# Altium PCB base_tiempo.PcbDoc (part 1 of 3)
Units mil, origin at the board's own origin, x right, y up, seen from the top; angles counter-clockwise.
Board outline 9832.52 x 6640 mil, 2 copper layers (Top Layer, Bottom Layer); 185 components, 479 nets, 1064 pads, 206 vias.
Unrouted connection lines stored in the file: 3.
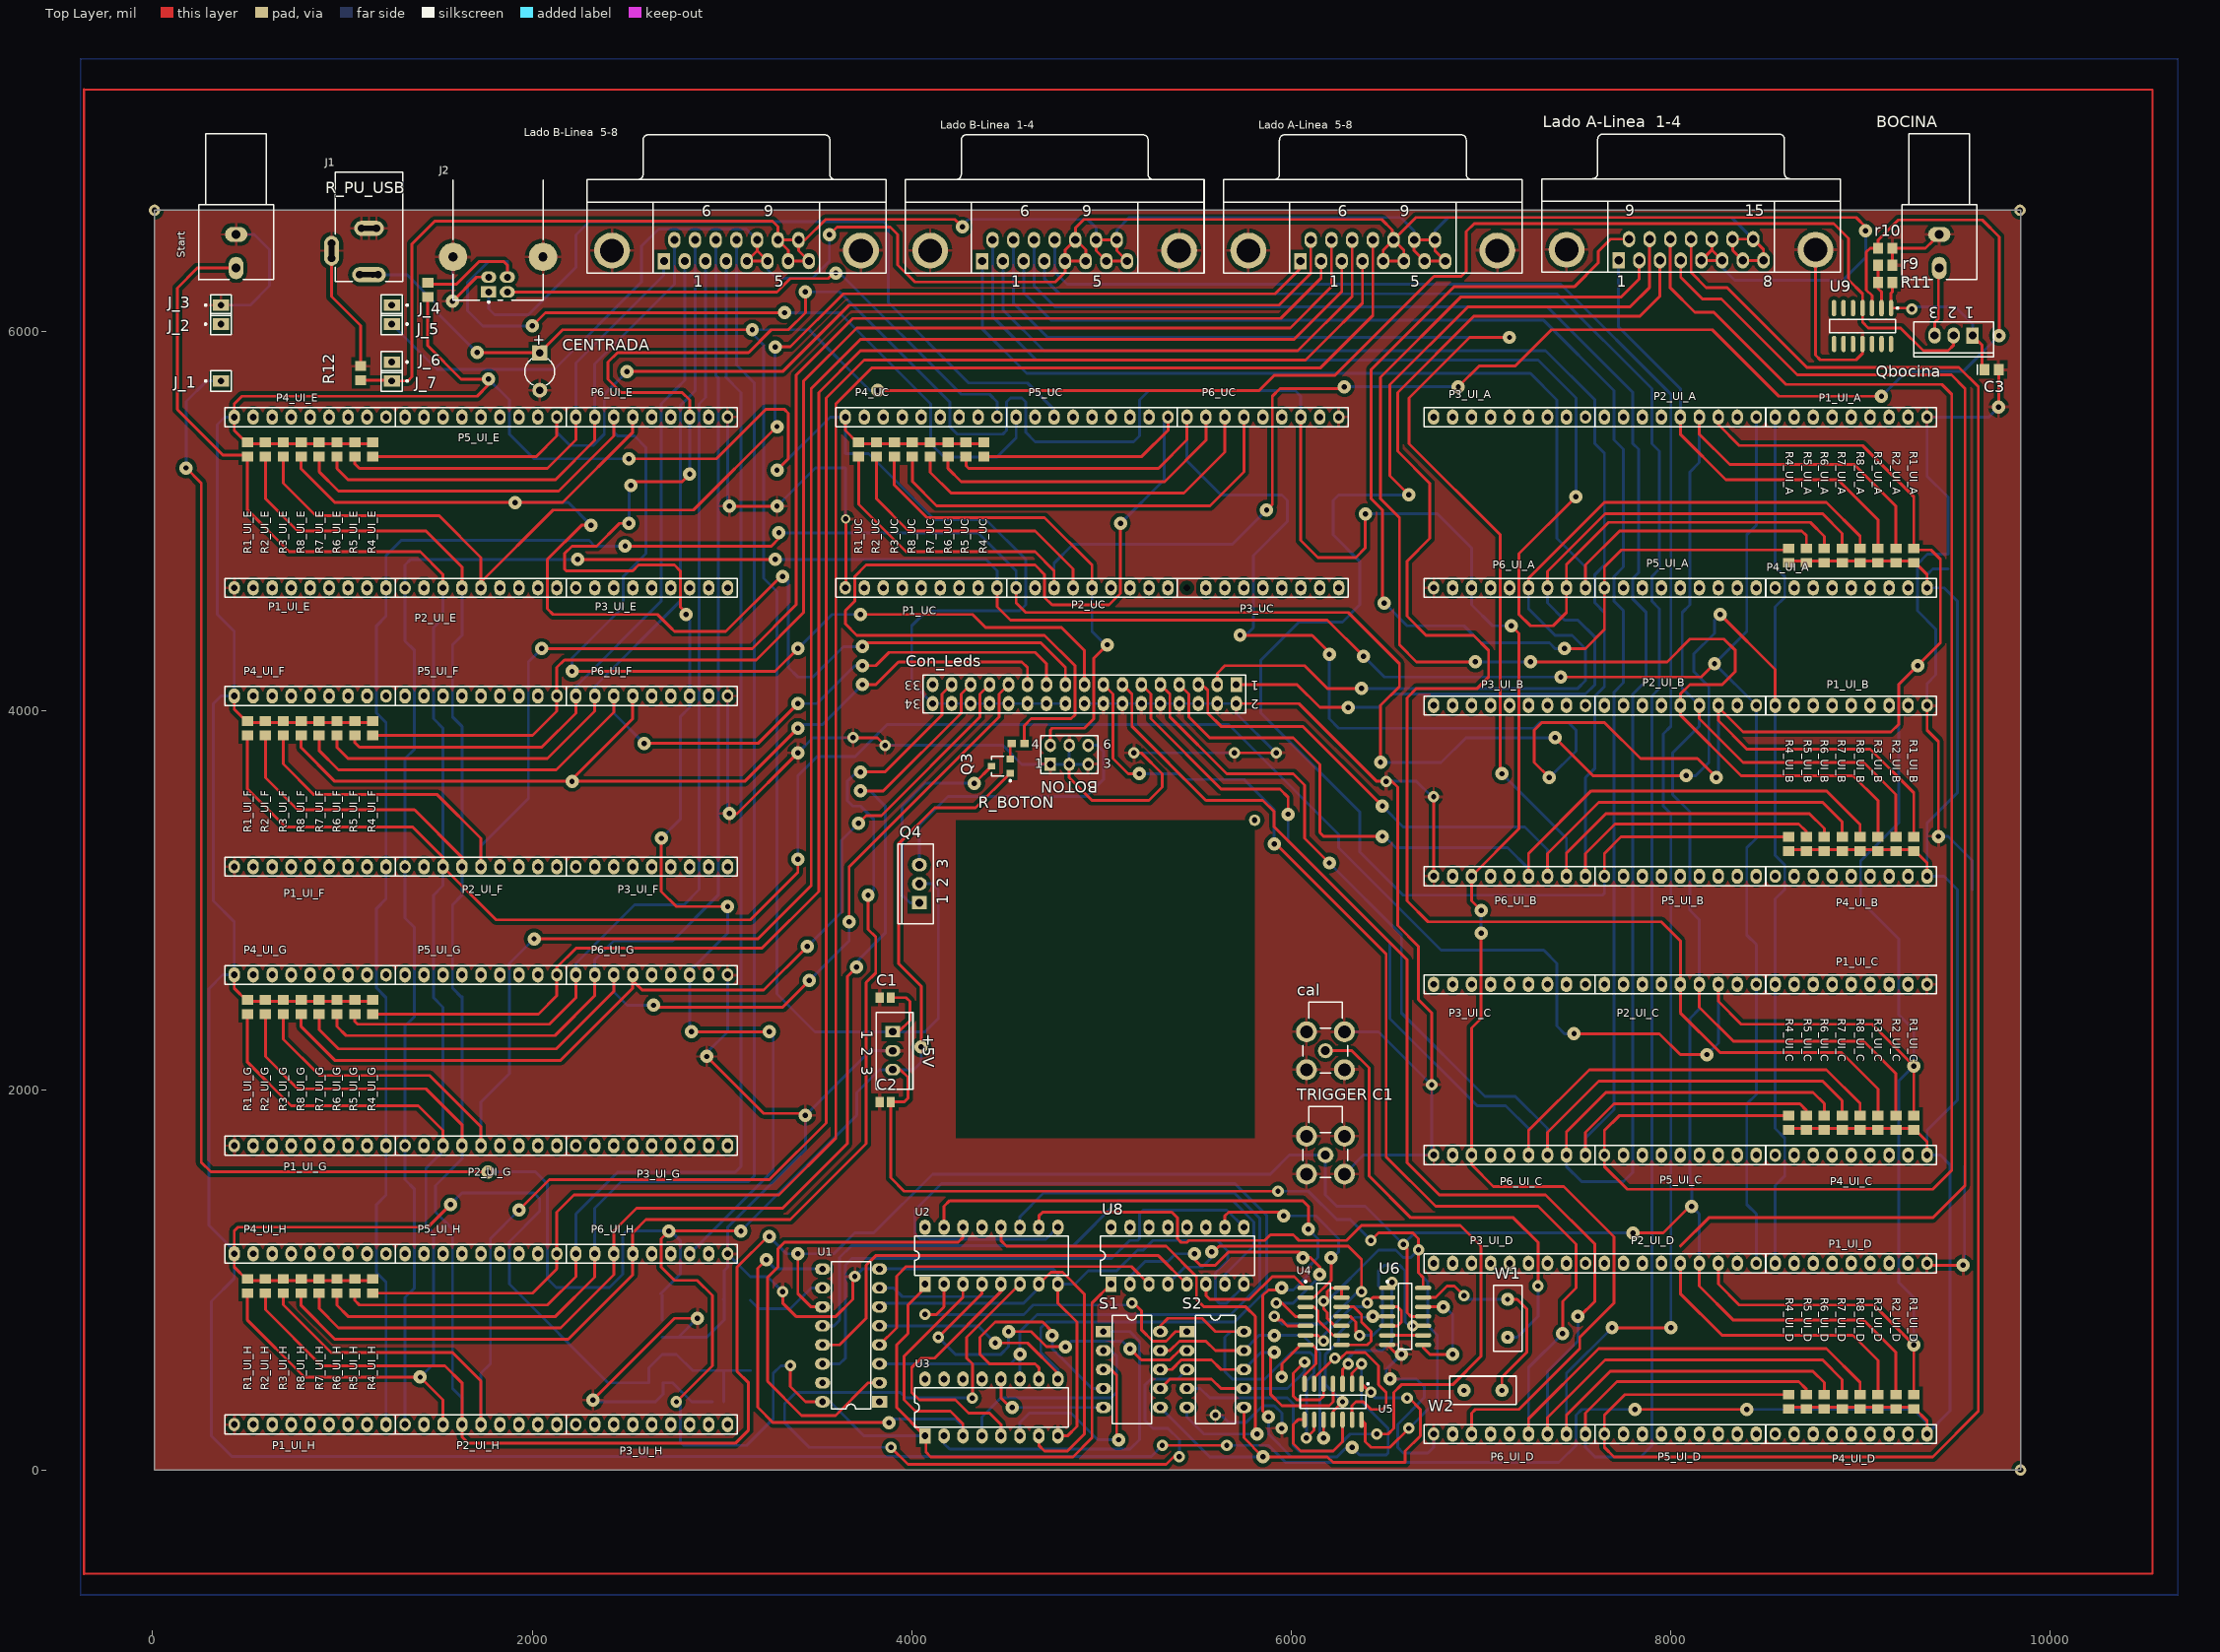
[diagram p0: Top Layer view]
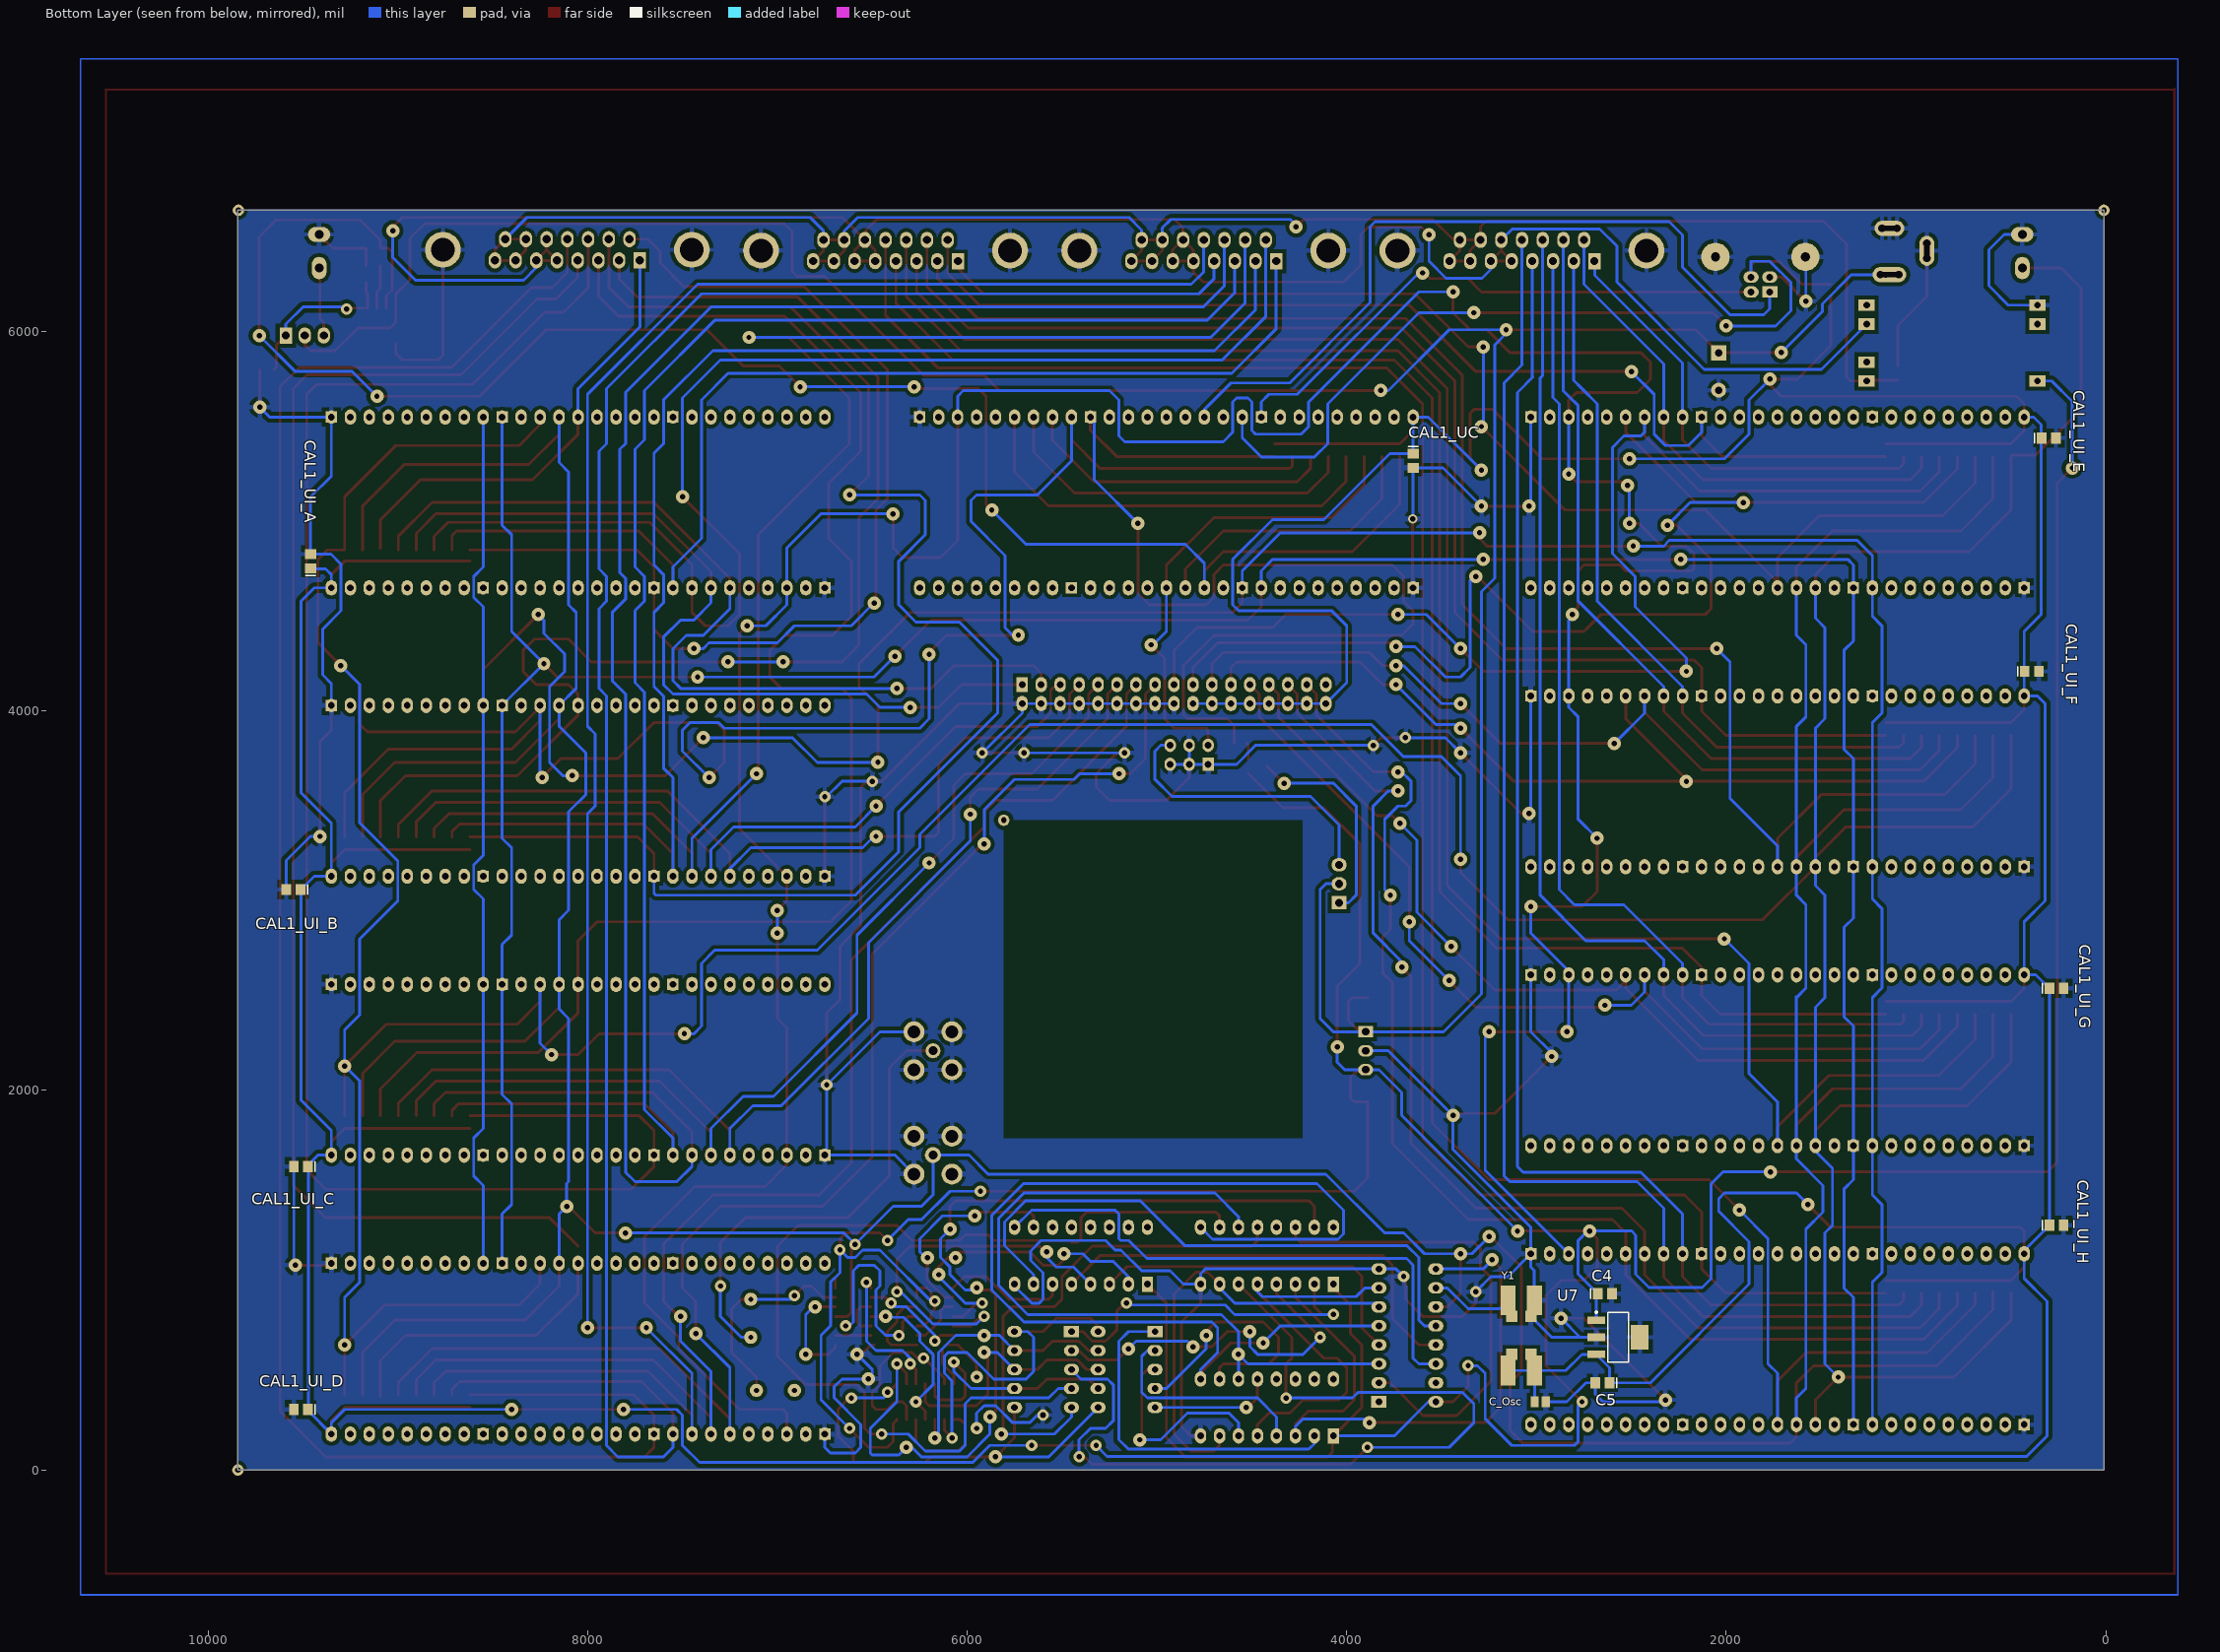
[diagram p1: Bottom Layer view, seen from below]

## Layer stack, top to bottom
Top Layer: signal copper 1.4
Dielectric: dielectric 12.6, FR-4, Dk 4.8
Bottom Layer: signal copper 1.4

## Board outline
9.58,6639.11 9.58,-0.89 9842.1,-0.89 9842.1,6639.11 9.58,6639.11

## Design rules (kind name [scope] priority, off if disabled: settings)
Clearance Clearance_1 [InNamedPolygon('Bottom Layer') Or  InNamedPolygon('Top Layer')] p1: gap=20
Clearance [InNamedPolygon('Top Layer')] p2: gap=20
Clearance 30mil [All] p3: gap=5
ComponentClearance [All] p1 off: gap=0 collisioncheckmode=3 verticalgap=10 showdistances=FALSE
FabricationTestPointUsage TestPointUsage [All] p1: valid=0 allowmultiple=FALSE
FabricationTestpoint Testpoint [(IsPad And (OnTopLayer Or OnBottomLayer))] p1: side=3 testpointundercomponent=TRUE minsize=40 maxsize=100 preferedsize=60 minholesize=0 maxholesize=40 preferedholesize=32 testpointgrid=1 allowsidetop=TRUE allowsidebottom=TRUE usegrid=TRUE gridtolerance=0.01
PolygonConnect PolygonConnect_3 [All vs IsNamedPolygon('Top Layer')] p1: connectstyle=Relief reliefconductorwidth=15 reliefentries=4 polygonreliefangle="90 Angle"
PolygonConnect PolygonConnect_2 [All vs IsNamedPolygon('Bottom Layer') Or  IsNamedPolygon('Top Layer')] p2: connectstyle=Relief reliefconductorwidth=25 reliefentries=4 polygonreliefangle="90 Angle"
PolygonConnect PolygonConnect_1 [All vs IsNamedPolygon('Top Layer')] p3: connectstyle=Relief reliefconductorwidth=25 reliefentries=4 polygonreliefangle="90 Angle"
PolygonConnect [All] p4: connectstyle=Relief reliefconductorwidth=10 reliefentries=4 polygonreliefangle="90 Angle"
RoomDefinition Designator [InComponentClass('Designator')] p1: confinementstyle=ConfineIn formatcopy=TRUE lockcomponents=FALSE outline 9889.58,59.11 11099.58,59.11 11099.58,329.11 9889.58,329.11
RoomDefinition UI_H [InComponentClass('UI_H')] p2: confinementstyle=ConfineIn formatcopy=TRUE lockcomponents=FALSE outline 229.58,49.11 3189.58,49.11 3189.58,1349.11 229.58,1349.11
RoomDefinition UI_G [InComponentClass('UI_G')] p3: confinementstyle=ConfineIn formatcopy=TRUE lockcomponents=FALSE outline -340.42,-330.89 10179.58,-330.89 10179.58,6719.11 -340.42,6719.11
RoomDefinition UI_F [InComponentClass('UI_F')] p4: confinementstyle=ConfineIn formatcopy=TRUE lockcomponents=FALSE outline -900.42,-460.89 11179.58,-460.89 11179.58,7849.11 -900.42,7849.11
RoomDefinition UI_E [InComponentClass('UI_E')] p5: confinementstyle=ConfineIn formatcopy=TRUE lockcomponents=FALSE outline -590.42,-10.89 11179.58,-10.89 11179.58,7729.11 -590.42,7729.11
RoomDefinition UI_D [InComponentClass('UI_D')] p6: confinementstyle=ConfineIn formatcopy=TRUE lockcomponents=FALSE outline -400.42,-140.89 10869.58,-140.89 10869.58,7539.11 -400.42,7539.11
RoomDefinition UI_C [InComponentClass('UI_C')] p7: confinementstyle=ConfineIn formatcopy=TRUE lockcomponents=FALSE outline -210.42,-10.89 10299.58,-10.89 10299.58,6969.11 -210.42,6969.11
RoomDefinition UI_B [InComponentClass('UI_B')] p8: confinementstyle=ConfineIn formatcopy=TRUE lockcomponents=FALSE outline -1280.42,-1110.89 9549.58,-1110.89 9549.58,7919.11 -1280.42,7919.11
RoomDefinition UI_A [InComponentClass('UI_A')] p9: confinementstyle=ConfineIn formatcopy=TRUE lockcomponents=FALSE outline -460.42,-520.89 10799.58,-520.89 10799.58,7599.11 -460.42,7599.11
RoomDefinition UC [InComponentClass('UC')] p10: confinementstyle=ConfineIn formatcopy=TRUE lockcomponents=FALSE outline -400.42,-10.89 10359.58,-10.89 10359.58,6779.11 -400.42,6779.11
RoomDefinition placa_madre [InComponentClass('placa_madre')] p11: confinementstyle=ConfineIn formatcopy=TRUE lockcomponents=FALSE outline 10929.58,-40.89 -1090.42,-40.89 -1090.42,7289.11 10929.58,7289.11
RoomDefinition BTIEMPO [InComponentClass('BTIEMPO')] p12: confinementstyle=ConfineIn formatcopy=TRUE lockcomponents=FALSE outline 10429.58,-1090.89 -590.42,-1090.89 -590.42,7849.11 10429.58,7849.11
RoomDefinition AND_5_Entradas [InComponentClass('AND_5_Entradas')] p13: confinementstyle=ConfineIn formatcopy=TRUE lockcomponents=FALSE outline 10359.58,-1400.89 -400.42,-1400.89 -400.42,7479.11 10359.58,7479.11
RoomDefinition Buffer_5Bits [InComponentClass('Buffer_5Bits')] p14: confinementstyle=ConfineIn formatcopy=TRUE lockcomponents=FALSE outline 11369.58,-1400.89 -970.42,-1400.89 -970.42,7349.11 11369.58,7349.11
RoutingVias [All] p1: holewidth=28 width=70 viastyle="Through Hole" minholewidth=28 minwidth=50 maxholewidth=28 maxwidth=100
SilkscreenOverComponentPads [All] p1: minsilkscreentomaskgap=10
SolderMaskExpansion [All] p1: expansion=4
Width [All] p1: maxlimit=15 minlimit=15 preferedwidth=15
24 further rules are at their usual default settings.

## Classes and differential pairs
component class Designator: J_1 J_2 J_3 J_4 J_5 J_6 J_7
channel class LPC1343: LPC1343_A LPC1343_B LPC1343_C LPC1343_D LPC1343_E LPC1343_F LPC1343_G LPC1343_H LPC1343_UC
component class UC: CAL1_UC P1_UC P2_UC P3_UC P4_UC P5_UC P6_UC R1_UC R2_UC R3_UC R4_UC R5_UC R6_UC R7_UC R8_UC
component class UI_H: CAL1_UI_H P1_UI_H P2_UI_H P3_UI_H P4_UI_H P5_UI_H P6_UI_H R1_UI_H R2_UI_H R3_UI_H R4_UI_H R5_UI_H R6_UI_H R7_UI_H R8_UI_H
component class UI_G: CAL1_UI_G P1_UI_G P2_UI_G P3_UI_G P4_UI_G P5_UI_G P6_UI_G R1_UI_G R2_UI_G R3_UI_G R4_UI_G R5_UI_G R6_UI_G R7_UI_G R8_UI_G
component class UI_F: CAL1_UI_F P1_UI_F P2_UI_F P3_UI_F P4_UI_F P5_UI_F P6_UI_F R1_UI_F R2_UI_F R3_UI_F R4_UI_F R5_UI_F R6_UI_F R7_UI_F R8_UI_F
component class UI_E: CAL1_UI_E P1_UI_E P2_UI_E P3_UI_E P4_UI_E P5_UI_E P6_UI_E R1_UI_E R2_UI_E R3_UI_E R4_UI_E R5_UI_E R6_UI_E R7_UI_E R8_UI_E
component class UI_D: CAL1_UI_D P1_UI_D P2_UI_D P3_UI_D P4_UI_D P5_UI_D P6_UI_D R1_UI_D R2_UI_D R3_UI_D R4_UI_D R5_UI_D R6_UI_D R7_UI_D R8_UI_D
component class UI_C: CAL1_UI_C P1_UI_C P2_UI_C P3_UI_C P4_UI_C P5_UI_C P6_UI_C R1_UI_C R2_UI_C R3_UI_C R4_UI_C R5_UI_C R6_UI_C R7_UI_C R8_UI_C
component class UI_B: CAL1_UI_B P1_UI_B P2_UI_B P3_UI_B P4_UI_B P5_UI_B P6_UI_B R1_UI_B R2_UI_B R3_UI_B R4_UI_B R5_UI_B R6_UI_B R7_UI_B R8_UI_B
component class UI_A: CAL1_UI_A P1_UI_A P2_UI_A P3_UI_A P4_UI_A P5_UI_A P6_UI_A R1_UI_A R2_UI_A R3_UI_A R4_UI_A R5_UI_A R6_UI_A R7_UI_A R8_UI_A
component class AND_5_Entradas: cal U4 U5 U6 W1 W2
component class Buffer_5Bits: S1 S2 U2 U3 U8
component class BTIEMPO: C_Osc C_Osc1 Pout1 Sw_Start1 Sw_Stop1 U1 Y1
component class placa_madre: +5V BOCINA BOTON C1 C2 C3 C4 C5 CENTRADA Con_Leds J1 J2 "Lado A-Linea 1-4" "Lado A-Linea  1-4" "Lado A-Linea  5-8" "Lado B-Linea  1-4" "Lado B-Linea  5-8" Q3 Q4 Qbocina r9 r10 R11 R12 R_BOTON R_PU_USB Start "TRIGGER C1" U7 U9

## Components (designator, comment, footprint, x,y, rotation, side; value= is the part's Value field where it differs from the comment)
+5V "MC7805CT" 221A-04 3899.58,2209.11 r270 top
BOCINA "RCA" RCA/4.5-H2 9414,6669.11 r90 top
BOTON "Header 3X2A" HDR2X3_CEN 4729.58,3719.11 r0 top
C1 "Cap Pol3" C0805#1 3859.58,2489.11 r180 top
C2 "Cap Pol3" C0805#1 3859.58,1939.11 r180 top
C3 "Cap Pol3" C0805#2 9689.58,5799.11 r0 top
C4 "Cap Pol3" C0805#2 2639.58,929.11 r180 bottom
C5 "Cap Pol3" C0805#2 2651.33,459.11 r0 bottom
C_Osc "Cap Pol3" C0805#1 2979.58,359.11 r180 bottom
cal "COAX-F" MCX5.08-H5#1 6179.58,2209.11 r270 top
CAL1_UC "Cap Pol3" C0805#2 3649.58,5319.11 r270 bottom (schematic designator CAL1)
CAL1_UI_A "Cap Pol3" C0805#2 9459.58,4789.11 r90 bottom (schematic designator CAL1)
CAL1_UI_B "Cap Pol3" C0805#2 9549.58,3059.11 r0 bottom (schematic designator CAL1)
CAL1_UI_C "Cap Pol3" C0805#2 9509.58,1599.11 r0 bottom (schematic designator CAL1)
CAL1_UI_D "Cap Pol3" C0805#2 9509.58,319.11 r0 bottom (schematic designator CAL1)
CAL1_UI_E "Cap Pol3" C0805#2 299.58,5439.11 r180 bottom (schematic designator CAL1)
CAL1_UI_F "Cap Pol3" C0805#2 389.58,4209.11 r180 bottom (schematic designator CAL1)
CAL1_UI_G "Cap Pol3" C0805#2 259.58,2539.11 r180 bottom (schematic designator CAL1)
CAL1_UI_H "Cap Pol3" C0805#2 259.58,1289.11 r180 bottom (schematic designator CAL1)
CENTRADA "Cap2" CAPR5-4X5 2039.58,5789.11 r270 top
Con_Leds "Header 17X2" HDR2X17 5709.58,4139.11 r180 top
J1 "PWR2.5" KLD-0202 1139.58,6839.11 r270 top
J2 "1-1470156-2" 1-1470156 1819.58,6799.11 r90 top
J_1 "Socket" PIN1 359.58,5739.11 r90 top
J_2 "Socket" PIN1 359.58,6039.11 r90 top
J_3 "Socket" PIN1 359.58,6139.11 r90 top
J_4 "Socket" PIN1 1259.58,6139.11 r270 top
J_5 "Socket" PIN1 1259.58,6039.11 r270 top
J_6 "Socket" PIN1 1259.58,5839.11 r270 top
J_7 "Socket" PIN1 1259.58,5739.11 r270 top
"Lado A-Linea  1-4" "D Connector 15" DSUB1.385-2H15 8106,6804.94 r0 top
"Lado A-Linea  5-8" "D Connector 15" DSUB1.385-2H15 6429.33,6801 r0 top
"Lado B-Linea  1-4" "D Connector 15" DSUB1.385-2H15 4752.67,6801 r0 top
"Lado B-Linea  5-8" "D Connector 15" DSUB1.385-2H15 3076,6801 r0 top
P1_UC "Header 9" HDR1X9 3649.58,4649.11 r0 top (schematic designator P1)
P1_UI_A "Header 9" HDR1X9 9349.58,5549.11 r180 top (schematic designator P1)
P1_UI_B "Header 9" HDR1X9 9349.58,4029.11 r180 top (schematic designator P1)
P1_UI_C "Header 9" HDR1X9 9349.58,2559.11 r180 top (schematic designator P1)
P1_UI_D "Header 9" HDR1X9 9349.58,1089.11 r180 top (schematic designator P1)
P1_UI_E "Header 9" HDR1X9 429.58,4649.11 r0 top (schematic designator P1)
P1_UI_F "Header 9" HDR1X9 429.58,3179.11 r0 top (schematic designator P1)
P1_UI_G "Header 9" HDR1X9 429.58,1709.11 r0 top (schematic designator P1)
P1_UI_H "Header 9" HDR1X9 429.58,239.11 r0 top (schematic designator P1)
P2_UC "Header 9" HDR1X9 4549.58,4649.11 r0 top (schematic designator P2)
P2_UI_A "Header 9" HDR1X9 8449.58,5549.11 r180 top (schematic designator P2)
P2_UI_B "Header 9" HDR1X9 8449.58,4029.11 r180 top (schematic designator P2)
P2_UI_C "Header 9" HDR1X9 8449.58,2559.11 r180 top (schematic designator P2)
P2_UI_D "Header 9" HDR1X9 8449.58,1089.11 r180 top (schematic designator P2)
P2_UI_E "Header 9" HDR1X9 1329.58,4649.11 r0 top (schematic designator P2)
P2_UI_F "Header 9" HDR1X9 1329.58,3179.11 r0 top (schematic designator P2)
P2_UI_G "Header 9" HDR1X9 1329.58,1709.11 r0 top (schematic designator P2)
P2_UI_H "Header 9" HDR1X9 1329.58,239.11 r0 top (schematic designator P2)
P3_UC "Header 9" HDR1X9 5449.58,4649.11 r0 top (schematic designator P3)
P3_UI_A "Header 9" HDR1X9 7549.58,5549.11 r180 top (schematic designator P3)
P3_UI_B "Header 9" HDR1X9 7549.58,4029.11 r180 top (schematic designator P3)
P3_UI_C "Header 9" HDR1X9 7549.58,2559.11 r180 top (schematic designator P3)
P3_UI_D "Header 9" HDR1X9 7549.58,1089.11 r180 top (schematic designator P3)
P3_UI_E "Header 9" HDR1X9 2229.58,4649.11 r0 top (schematic designator P3)
P3_UI_F "Header 9" HDR1X9 2229.58,3179.11 r0 top (schematic designator P3)
P3_UI_G "Header 9" HDR1X9 2229.58,1709.11 r0 top (schematic designator P3)
P3_UI_H "Header 9" HDR1X9 2229.58,239.11 r0 top (schematic designator P3)
P4_UC "Header 9" HDR1X9 4449.58,5549.11 r180 top (schematic designator P4)
P4_UI_A "Header 9" HDR1X9 8549.58,4649.11 r0 top locked (schematic designator P4)
P4_UI_B "Header 9" HDR1X9 8549.58,3129.11 r0 top (schematic designator P4)
P4_UI_C "Header 9" HDR1X9 8549.58,1659.11 r0 top (schematic designator P4)
P4_UI_D "Header 9" HDR1X9 8549.58,189.11 r0 top (schematic designator P4)
P4_UI_E "Header 9" HDR1X9 1229.58,5549.11 r180 top (schematic designator P4)
P4_UI_F "Header 9" HDR1X9 1229.58,4079.11 r180 top (schematic designator P4)
P4_UI_G "Header 9" HDR1X9 1229.58,2609.11 r180 top (schematic designator P4)
P4_UI_H "Header 9" HDR1X9 1229.58,1139.11 r180 top (schematic designator P4)
P5_UC "Header 9" HDR1X9 5349.58,5549.11 r180 top (schematic designator P5)
P5_UI_A "Header 9" HDR1X9 7649.58,4649.11 r0 top locked (schematic designator P5)
P5_UI_B "Header 9" HDR1X9 7649.58,3129.11 r0 top (schematic designator P5)
P5_UI_C "Header 9" HDR1X9 7649.58,1659.11 r0 top (schematic designator P5)
P5_UI_D "Header 9" HDR1X9 7649.58,189.11 r0 top (schematic designator P5)
P5_UI_E "Header 9" HDR1X9 2129.58,5549.11 r180 top (schematic designator P5)
P5_UI_F "Header 9" HDR1X9 2129.58,4079.11 r180 top (schematic designator P5)
P5_UI_G "Header 9" HDR1X9 2129.58,2609.11 r180 top (schematic designator P5)
P5_UI_H "Header 9" HDR1X9 2129.58,1139.11 r180 top (schematic designator P5)
P6_UC "Header 9" HDR1X9 6249.58,5549.11 r180 top (schematic designator P6)
P6_UI_A "Header 9" HDR1X9 6749.58,4649.11 r0 top locked (schematic designator P6)
P6_UI_B "Header 9" HDR1X9 6749.58,3129.11 r0 top (schematic designator P6)
P6_UI_C "Header 9" HDR1X9 6749.58,1659.11 r0 top (schematic designator P6)
P6_UI_D "Header 9" HDR1X9 6749.58,189.11 r0 top (schematic designator P6)
P6_UI_E "Header 9" HDR1X9 3029.58,5549.11 r180 top (schematic designator P6)
P6_UI_F "Header 9" HDR1X9 3029.58,4079.11 r180 top (schematic designator P6)
P6_UI_G "Header 9" HDR1X9 3029.58,2609.11 r180 top (schematic designator P6)
P6_UI_H "Header 9" HDR1X9 3029.58,1139.11 r180 top (schematic designator P6)
Q3 "QNPN" SOT-23B 4469.58,3709.11 r90 top
Q4 "D44H8" TO-220#1 4039.58,3089.11 r90 top
Qbocina "D44H8" TO-220#2 9489.58,5979.11 r180 top
R1_UC "Res3" 2012[0805] 3719.58,5379.11 r90 top (schematic designator R1)
R1_UI_A "Res3" 2012[0805] 9279.58,4819.11 r270 top (schematic designator R1)
R1_UI_B "Res3" 2012[0805] 9279.58,3299.11 r270 top (schematic designator R1)
R1_UI_C "Res3" 2012[0805] 9279.58,1829.11 r270 top (schematic designator R1)
R1_UI_D "Res3" 2012[0805] 9279.58,359.11 r270 top (schematic designator R1)
R1_UI_E "Res3" 2012[0805] 499.58,5379.11 r90 top (schematic designator R1)
R1_UI_F "Res3" 2012[0805] 499.58,3909.11 r90 top (schematic designator R1)
R1_UI_G "Res3" 2012[0805] 499.58,2439.11 r90 top (schematic designator R1)
R1_UI_H "Res3" 2012[0805] 499.58,969.11 r90 top (schematic designator R1)
R2_UC "Res3" 2012[0805] 3813.87,5379.11 r90 top (schematic designator R2)
R2_UI_A "Res3" 2012[0805] 9185.3,4819.11 r270 top (schematic designator R2)
R2_UI_B "Res3" 2012[0805] 9185.3,3299.11 r270 top (schematic designator R2)
R2_UI_C "Res3" 2012[0805] 9185.3,1829.11 r270 top (schematic designator R2)
R2_UI_D "Res3" 2012[0805] 9185.3,359.11 r270 top (schematic designator R2)
R2_UI_E "Res3" 2012[0805] 593.87,5379.11 r90 top (schematic designator R2)
R2_UI_F "Res3" 2012[0805] 593.87,3909.11 r90 top (schematic designator R2)
R2_UI_G "Res3" 2012[0805] 593.87,2439.11 r90 top (schematic designator R2)
R2_UI_H "Res3" 2012[0805] 593.87,969.11 r90 top (schematic designator R2)
R3_UC "Res3" 2012[0805] 3908.15,5379.11 r90 top (schematic designator R3)
R3_UI_A "Res3" 2012[0805] 9091.01,4819.11 r270 top (schematic designator R3)
R3_UI_B "Res3" 2012[0805] 9091.01,3299.11 r270 top (schematic designator R3)
R3_UI_C "Res3" 2012[0805] 9091.01,1829.11 r270 top (schematic designator R3)
R3_UI_D "Res3" 2012[0805] 9091.01,359.11 r270 top (schematic designator R3)
R3_UI_E "Res3" 2012[0805] 688.15,5379.11 r90 top (schematic designator R3)
R3_UI_F "Res3" 2012[0805] 688.15,3909.11 r90 top (schematic designator R3)
R3_UI_G "Res3" 2012[0805] 688.15,2439.11 r90 top (schematic designator R3)
R3_UI_H "Res3" 2012[0805] 688.15,969.11 r90 top (schematic designator R3)
R4_UC "Res3" 2012[0805] 4379.58,5379.11 r90 top (schematic designator R4)
R4_UI_A "Res3" 2012[0805] 8619.58,4819.11 r270 top locked (schematic designator R4)
R4_UI_B "Res3" 2012[0805] 8619.58,3299.11 r270 top (schematic designator R4)
R4_UI_C "Res3" 2012[0805] 8619.58,1829.11 r270 top (schematic designator R4)
R4_UI_D "Res3" 2012[0805] 8619.58,359.11 r270 top (schematic designator R4)
R4_UI_E "Res3" 2012[0805] 1159.58,5379.11 r90 top (schematic designator R4)
R4_UI_F "Res3" 2012[0805] 1159.58,3909.11 r90 top (schematic designator R4)
R4_UI_G "Res3" 2012[0805] 1159.58,2439.11 r90 top (schematic designator R4)
R4_UI_H "Res3" 2012[0805] 1159.58,969.11 r90 top (schematic designator R4)
R5_UC "Res3" 2012[0805] 4285.3,5379.11 r90 top (schematic designator R5)
R5_UI_A "Res3" 2012[0805] 8713.87,4819.11 r270 top locked (schematic designator R5)
R5_UI_B "Res3" 2012[0805] 8713.87,3299.11 r270 top (schematic designator R5)
R5_UI_C "Res3" 2012[0805] 8713.87,1829.11 r270 top (schematic designator R5)
R5_UI_D "Res3" 2012[0805] 8713.87,359.11 r270 top (schematic designator R5)
R5_UI_E "Res3" 2012[0805] 1065.3,5379.11 r90 top (schematic designator R5)
R5_UI_F "Res3" 2012[0805] 1065.3,3909.11 r90 top (schematic designator R5)
R5_UI_G "Res3" 2012[0805] 1065.3,2439.11 r90 top (schematic designator R5)
R5_UI_H "Res3" 2012[0805] 1065.3,969.11 r90 top (schematic designator R5)
R6_UC "Res3" 2012[0805] 4191.01,5379.11 r90 top (schematic designator R6)
R6_UI_A "Res3" 2012[0805] 8808.15,4819.11 r270 top locked (schematic designator R6)
R6_UI_B "Res3" 2012[0805] 8808.15,3299.11 r270 top (schematic designator R6)
R6_UI_C "Res3" 2012[0805] 8808.15,1829.11 r270 top (schematic designator R6)
R6_UI_D "Res3" 2012[0805] 8808.15,359.11 r270 top (schematic designator R6)
R6_UI_E "Res3" 2012[0805] 971.01,5379.11 r90 top (schematic designator R6)
R6_UI_F "Res3" 2012[0805] 971.01,3909.11 r90 top (schematic designator R6)
R6_UI_G "Res3" 2012[0805] 971.01,2439.11 r90 top (schematic designator R6)
R6_UI_H "Res3" 2012[0805] 971.01,969.11 r90 top (schematic designator R6)
R7_UC "Res3" 2012[0805] 4096.72,5379.11 r90 top (schematic designator R7)
R7_UI_A "Res3" 2012[0805] 8902.44,4819.11 r270 top locked (schematic designator R7)
R7_UI_B "Res3" 2012[0805] 8902.44,3299.11 r270 top (schematic designator R7)
R7_UI_C "Res3" 2012[0805] 8902.44,1829.11 r270 top (schematic designator R7)
R7_UI_D "Res3" 2012[0805] 8902.44,359.11 r270 top (schematic designator R7)
R7_UI_E "Res3" 2012[0805] 876.72,5379.11 r90 top (schematic designator R7)
R7_UI_F "Res3" 2012[0805] 876.72,3909.11 r90 top (schematic designator R7)
R7_UI_G "Res3" 2012[0805] 876.72,2439.11 r90 top (schematic designator R7)
R7_UI_H "Res3" 2012[0805] 876.72,969.11 r90 top (schematic designator R7)
R8_UC "Res3" 2012[0805] 4002.44,5379.11 r90 top (schematic designator R8)
R8_UI_A "Res3" 2012[0805] 8996.72,4819.11 r270 top (schematic designator R8)
R8_UI_B "Res3" 2012[0805] 8996.72,3299.11 r270 top (schematic designator R8)
R8_UI_C "Res3" 2012[0805] 8996.72,1829.11 r270 top (schematic designator R8)
R8_UI_D "Res3" 2012[0805] 8996.72,359.11 r270 top (schematic designator R8)
R8_UI_E "Res3" 2012[0805] 782.44,5379.11 r90 top (schematic designator R8)
R8_UI_F "Res3" 2012[0805] 782.44,3909.11 r90 top (schematic designator R8)
R8_UI_G "Res3" 2012[0805] 782.44,2439.11 r90 top (schematic designator R8)
R8_UI_H "Res3" 2012[0805] 782.44,969.11 r90 top (schematic designator R8)
r9 "Res3" 2012[0805] 9129.58,6349.11 r0 top
r10 "Res3" 2012[0805] 9129.58,6439.11 r180 top
R11 "Res3" 2012[0805] 9129.58,6259.11 r0 top
R12 "Res3" 2012[0805] 1096,5781 r90 top
R_BOTON "Res3" J1-0603 4559.58,3829.11 r0 top
R_PU_USB "Res3" 2012[0805] 1449.58,6219.11 r270 top
S1 "SW DIP-5" N10A 5159.58,529.11 r270 top
S2 "SW DIP-5" N10A 5599.58,529.11 r270 top
Start "RCA" RCA/4.5-H2 439.58,6669.11 r90 top
"TRIGGER C1" "COAX-F" MCX5.08-H5#2 6179.58,1659.11 r270 top
U1 "SN74HC4040N" N016 3679.58,709.11 r90 top
U2 "M54HC4050F1R" DIP16#1 4419.58,1129.11 r0 top
U3 "M54HC4049F1R" DIP16#1 4419.58,329.11 r0 top
U4 "SN74F08D" D014_N 6169.58,809.11 r0 top
U5 "SN74F08D" D014_N 6219.58,359.11 r270 top
U6 "SN74F08D" D014_N 6599.58,809.11 r0 top
U7 "LM3940IMP-3.3" MP04A_N 2569.58,699.11 r180 bottom
U8 "M54HC4050F1R" DIP16#2 5399.58,1129.11 r0 top
U9 "LM324AD" 751A-02_N 9009.58,6029.11 r270 top
W1 "Jumper" RAD-0.2 7139.58,799.11 r90 top
W2 "Jumper" RAD-0.2 7009.58,419.11 r0 top
Y1 "ECS-240-20-7M" ECX-3M 3079.58,709.11 r90 bottom

## Footprints (in the part's own frame and the unit in brackets; to place one, negate y for a bottom-side part, rotate by r counter-clockwise, add the part's x,y. Pads: shape width x height; smd on the part's side, far side on the other; paste and mask are expansions set on the pad)
1-1470156 [mm] "Connector; USB1.1, Type B, Thru-Hole; 4 Position; Right Angle"
  rect 1.524x2.032 hole 0.92: 1(-15.01,1.25)
  oval 1.524x2.032 hole 0.92: 2(-15.01,-1.25) 3(-13.01,-1.25) 4(-13.01,1.25)
  round 3.8 hole 1.2: 5(-10.3,6.02) 6(-10.3,-6.02)
  silkscreen extent -16.48,-6.05 -0.02,6.05
221A-04 [mil] "TO, Thru-Hole, Vertical, Heatsink Mounted; 3 In-Line Leads; Pitch 2.54 mm"
  rect 60x80 hole 39.37: 1(-100,0)
  oval 60x80 hole 39.37: 2(0,0) 3(100,0)
  silkscreen extent -203,-87 203,106
751A-02_N [mm] "SOIC, 14-Leads, Body 8.7x3.9mm, Pitch 1.27mm, IPC Medium Density"
  oval 2.2x0.6 smd: 1(-2.4,3.81) 2(-2.4,2.54) 3(-2.4,1.27) 4(-2.4,0) 5(-2.4,-1.27) 6(-2.4,-2.54) 7(-2.4,-3.81) 8(2.4,-3.81) 9(2.4,-2.54) 10(2.4,-1.27) 11(2.4,0) 12(2.4,1.27) 13(2.4,2.54) 14(2.4,3.81)
  silkscreen extent -2.52,-4.4 0.9,4.79, body extent -1.95,-4.33 1.95,4.33, height 1.75
2012[0805] [mm] "Chip Resistor; Body 2.0 x 1.3 mm (LxW typ)"
  rect 1.3x1.5 smd: 1(-0.95,0) 2(0.95,0)
C0805#1 [mm] "Chip Capacitor, Body 2.0x1.3mm, IPC High Density"
  rect 1.1x1.4 smd: 1(-0.75,0) 2(0.75,0)
  body extent -1.1,-0.72 1.1,0.72, height 1.4
C0805#2 [mm] "Chip Capacitor; Body 2.0 x 1.2 mm (LxW typ)"
  rect 1.3x1.5 smd: 1(-0.95,0) 2(0.95,0)
  silkscreen extent -1.9,-0.65 -1.9,0.65
CAPR5-4X5 [mm] "Capacitor; 2 Leads"
  rect 2x2 hole 1: 1(-2.5,0)
  round 2 hole 1: 2(2.5,0)
  silkscreen extent -1.69,-2 1.82,2
D014_N [mm] "SOIC, 14-Leads, Body 8.7x3.9mm, Pitch 1.27mm, IPC Medium Density"
  oval 2.2x0.6 smd: 1(-2.4,3.81) 2(-2.4,2.54) 3(-2.4,1.27) 4(-2.4,0) 5(-2.4,-1.27) 6(-2.4,-2.54) 7(-2.4,-3.81) 8(2.4,-3.81) 9(2.4,-2.54) 10(2.4,-1.27) 11(2.4,0) 12(2.4,1.27) 13(2.4,2.54) 14(2.4,3.81)
  silkscreen extent -2.52,-4.4 0.9,4.78, body extent -1.95,-4.33 1.95,4.33, height 1.75
DIP16#1 [mil] "DIP; 16 Leads; Row Spacing 7.62 mm; Pitch 2.54 mm"
  rect 60x80 hole 35.43: 1(-350,-150)
  oval 60x80 hole 35.43: 2(-250,-150) 3(-150,-150) 4(-50,-150) 5(50,-150) 6(150,-150) 7(250,-150) 8(350,-150) 9(350,150) 10(250,150) 11(150,150) 12(50,150) 13(-50,150) 14(-150,150) 15(-250,150) 16(-350,150)
  silkscreen extent -406,-104 406,104
DIP16#2 [mil] "DIP; 16 Leads; Row Spacing 7.62 mm; Pitch 2.54 mm"
  rect 59.05x80 hole 35.43: 1(-350,-150)
  oval 59.05x80 hole 35.43: 2(-250,-150) 3(-150,-150) 4(-50,-150) 5(50,-150) 6(150,-150) 7(250,-150) 8(350,-150) 9(350,150) 10(250,150) 11(150,150) 12(50,150) 13(-50,150) 14(-150,150) 15(-250,150) 16(-350,150)
  silkscreen extent -406,-104 406,104
DSUB1.385-2H15 [mm] "Connector; D Subminiature; 15 Position; Right Angle; Pitch 1.385 mm"
  rect 1.651x2.159 hole 1.09: 1(-9.695,-10.92)
  oval 1.651x2.159 hole 1.09: 2(-6.925,-10.92) 3(-4.155,-10.92) 4(-1.385,-10.92) 5(1.385,-10.92) 6(4.155,-10.92) 7(6.925,-10.92) 8(9.695,-10.92) 9(-8.31,-8.08) 10(-5.54,-8.08) 11(-2.77,-8.08) 12(0,-8.08) 13(2.77,-8.08) 14(5.54,-8.08) 15(8.31,-8.08)
  round 4.8 hole 3.18: 16(-16.66,-9.5) 17(16.66,-9.5)
  silkscreen extent -20,-12.5 20,6
ECX-3M [mm] "Quartz Crystal, SM; 4 Leads; Body 13 x 4.7 x 4.2 mm (LxWxH)"
  rect 4x2 smd: 1(-4.7,-1.75) 2(4.7,-1.75) 3(4.7,1.75) 4(-4.7,1.75)
HDR1X9 [mil] "Connector; Header; 9 Position"
  round 0 / inner round 0 / far side rect 60x59.06 hole 35.43: 1(0,0)
  oval 60x80 hole 35.43: 2(100,0) 3(200,0) 4(300,0) 5(400,0) 6(500,0) 7(600,0) 8(700,0) 9(800,0)
  silkscreen extent -50,-50 850,50
HDR2X3_CEN [mil] "Connector; Header; 3x2 Position"
  rect 60x70 hole 35.43: 1(0,0)
  oval 60x70 hole 35.43: 2(100,0) 3(200,0) 4(0,100) 5(100,100) 6(200,100)
  silkscreen extent -50,-50 250,150
HDR2X17 [mil] "Connector; Header; 17x2 Position"
  rect 60x80 hole 35.43: 1(0,0)
  oval 60x80 hole 35.43: 2(0,100) 3(100,0) 4(100,100) 5(200,0) 6(200,100) 7(300,0) 8(300,100) 9(400,0) 10(400,100) 11(500,0) 12(500,100) 13(600,0) 14(600,100) 15(700,0) 16(700,100) 17(800,0) 18(800,100) 19(900,0) 20(900,100) 21(1000,0) 22(1000,100) 23(1100,0) 24(1100,100) 25(1200,0) 26(1200,100) 27(1300,0) 28(1300,100) 29(1400,0) 30(1400,100) 31(1500,0) 32(1500,100) 33(1600,0) 34(1600,100)
  silkscreen extent -50,-50 1650,150
J1-0603 [mm] "Chip Resistor; Body 1.6 x 0.8 mm (LxW typ)"
  rect 1.1x1 smd: 1(-0.85,0) 2(0.85,0)
KLD-0202 [mm] "DC Power Jack, 2.5mm, KLD Series, PCB Mount"
  oval 2x4.5 all layers, no hole: 1(13.7,0)
  oval 2.032x1.5 hole 1: 1A(13.7,-1.25) 1B(13.7,1.25) 2A(7.5,-1) 2B(7.5,1) 3A(9.5,-5) 3B(11.5,-5)
  oval 2x4 all layers, no hole: 2(7.5,0)
  oval 4x2 all layers, no hole: 3(10.5,-5)
  silkscreen extent 0,-4.5 14.6,4.5
MCX5.08-H5#1 [mm] "Connector; RF Coaxial, MCX, Thru-Hole; 5 Position; Right-Angle"
  round 2 hole 1.2: 1(0,0)
  round 2.8 hole 1.7: 2(-2.54,-2.54) 3(2.54,-2.54) 4(2.54,2.54) 5(-2.54,2.54)
  silkscreen extent -6.5,-3 3,3
MCX5.08-H5#2 [mm] "Connector; RF Coaxial, MCX, Thru-Hole; 5 Position; Right-Angle"
  round 2.159 hole 1.2: 1(0,0)
  round 2.8 hole 1.7: 2(-2.54,-2.54) 3(2.54,-2.54) 4(2.54,2.54) 5(-2.54,2.54)
  silkscreen extent -6.5,-3 3,3
MP04A_N [mm] "SOT223, 4-Leads, Body 6.5x3.5mm, Pitch 2.3mm, Lead Span 7mm, IPC Medium Density"
  rect 2.4x1 smd: 1(-2.9,2.3) 2(-2.9,0) 3(-2.9,-2.3)
  rect 2.4x3.3 smd: 4(2.9,0)
  silkscreen extent -3.03,-3.35 1.4,3.47, body extent -1.85,-3.35 1.85,3.35, height 1.8
N10A [mm] "DIP; 10 Leads; Row Spacing 7.62 mm; Pitch 2.54 mm"
  rect 1.5x2.032 hole 0.9: 1(-5.08,-3.81)
  oval 1.5x2.032 hole 0.9: 2(-2.54,-3.81) 3(0,-3.81) 4(2.54,-3.81) 5(5.08,-3.81) 6(5.08,3.81) 7(2.54,3.81) 8(0,3.81) 9(-2.54,3.81) 10(-5.08,3.81)
  silkscreen extent -7.25,-2.65 7.25,2.65
N016 [mil] "DIP; 16 Leads; Row Spacing 7.62 mm; Pitch 2.54 mm"
  rect 60x80 hole 35.43: 1(-350,-150)
  oval 60x80 hole 35.43: 2(-250,-150) 3(-150,-150) 4(-50,-150) 5(50,-150) 6(150,-150) 7(250,-150) 8(350,-150) 9(350,150) 10(250,150) 11(150,150) 12(50,150) 13(-50,150) 14(-150,150) 15(-250,150) 16(-350,150)
  silkscreen extent -388,-104 388,104
PIN1 [mil] "Connector; Plug"
  rect 60x85 hole 35.43: 1(0,0)
  silkscreen extent -55,-55 55,86
RAD-0.2 [mil] "Jumper Wire; 2 Leads"
  round 70 hole 27.56: 1(-100,0) 2(100,0)
  silkscreen extent -175,-75 175,75
RCA/4.5-H2 [mm] "Two Conductor Jack (RCA), Right Angle, Thru-Hole, Body 10 x 10 x 13 mm (WxTxH)"
  oval 2x3 hole 1.2: 1A(-4,0)
  oval 3x2 hole 1.2: 2B(-8.496,0)
  silkscreen extent -10.07,-5 9.5,5
SOT-23B [mm] "SOT-23; 3 Leads; Body 3.0 x 2.6 mm, inc. leads (LxW max)"
  rect 0.9x0.95 smd: 1(-0.95,-1.25) 2(0.95,-1.25) 3(0,1.25)
  silkscreen extent -2.07,-1.38 1.3,1.25
TO-220#1 [mil] "TO, Thru-Hole, Vertical, Heatsink Mounted; 3 In-Line Leads; Pitch 2.54 mm"
  rect 70x80 hole 43.31: 1(-100,0)
  oval 70x80 hole 43.31: 2(0,0) 3(100,0)
  silkscreen extent -211,-73 211,112
TO-220#2 [mil] "TO, Thru-Hole, Vertical, Heatsink Mounted; 3 In-Line Leads; Pitch 2.54 mm"
  rect 65x85 hole 43.31: 1(-100,0)
  oval 65x85 hole 43.31: 2(0,0) 3(100,0)
  silkscreen extent -211,-73 211,112

## Part data
+5V: "3-Terminal Positive Fixed Voltage Regulator"
BOCINA Start: "RCA Phono Jack, Right Angle, Thru-Hole, Snap-In"
BOTON: "Header, 3-Pin, Dual row"
C1 C2 C3 C4 C5 C_Osc CAL1_UC CAL1_UI_A CAL1_UI_B CAL1_UI_C CAL1_UI_D CAL1_UI_E CAL1_UI_F CAL1_UI_G CAL1_UI_H: "Polarized Capacitor (Surface Mount)"
cal "TRIGGER C1": "RF Coaxial PCB Connector, MCX; Thru-Hole, Right-Angle Mount Socket, Blunt Post Terminal, 50 Ohm Impedance"
CENTRADA: "Capacitor"
Con_Leds: "Header, 17-Pin, Dual row"
J1: "Low Voltage Power Supply Connector"
J2: "USB 1.1, Right Angle, Thru-Hole, B Type, Receptacle, 4 Position, Black"
"Lado A-Linea  1-4": "Receptacle Assembly, 15 Position, Right Angle"
"Lado A-Linea  5-8" "Lado B-Linea  1-4" "Lado B-Linea  5-8": library part "D Connector 9", "Receptacle Assembly, 9 Position, Right Angle"
P1_UC P1_UI_A P1_UI_B P1_UI_C P1_UI_D P1_UI_E P1_UI_F P1_UI_G P1_UI_H P2_UC P2_UI_A P2_UI_B P2_UI_C P2_UI_D P2_UI_E P2_UI_F P2_UI_G P2_UI_H P3_UC P3_UI_A P3_UI_B P3_UI_C P3_UI_D P3_UI_E P3_UI_F P3_UI_G P3_UI_H P4_UC P4_UI_A P4_UI_B P4_UI_C P4_UI_D P4_UI_E P4_UI_F P4_UI_G P4_UI_H P5_UC P5_UI_A P5_UI_B P5_UI_C P5_UI_D P5_UI_E P5_UI_F P5_UI_G P5_UI_H P6_UC P6_UI_A P6_UI_B P6_UI_C P6_UI_D P6_UI_E P6_UI_F P6_UI_G P6_UI_H: "Header, 9-Pin"
Q3: "NPN Bipolar Transistor"
Q4 Qbocina: "NPN Power Amplifier"
R1_UC R1_UI_A R1_UI_B R1_UI_C R1_UI_D R1_UI_E R1_UI_F R1_UI_G R1_UI_H R2_UC R2_UI_A R2_UI_B R2_UI_C R2_UI_D R2_UI_E R2_UI_F R2_UI_G R2_UI_H R3_UC R3_UI_A R3_UI_B R3_UI_C R3_UI_D R3_UI_E R3_UI_F R3_UI_G R3_UI_H R4_UC R4_UI_A R4_UI_B R4_UI_C R4_UI_D R4_UI_E R4_UI_F R4_UI_G R4_UI_H R5_UC R5_UI_A R5_UI_B R5_UI_C R5_UI_D R5_UI_E R5_UI_F R5_UI_G R5_UI_H R6_UC R6_UI_A R6_UI_B R6_UI_C R6_UI_D R6_UI_E R6_UI_F R6_UI_G R6_UI_H R7_UC R7_UI_A R7_UI_B R7_UI_C R7_UI_D R7_UI_E R7_UI_F R7_UI_G R7_UI_H R8_UC R8_UI_A R8_UI_B R8_UI_C R8_UI_D R8_UI_E R8_UI_F R8_UI_G R8_UI_H r9 r10 R11 R12 R_BOTON R_PU_USB: "Resistor"
S1 S2: "DIP Switch, 5 Position, SPST"
U1: "12-Bit Asynchronous Binary Counter"
U2 U8: "Hex Buffer/Converter Non-Inverting"
U3: "Hex Buffer/Converter Invertering"
U4 U5: library part M54HCT08F1R, "Quad 2-Input AND Gate"
U6: "Quadruple 2-Input Positive-AND Gate"
U7: "1A Low Dropout Regulator for 5V to 3.3V Conversion, 4-pin SOT-223"
U9: "Quad Low-Power Operational Amplifier"
W1 W2: "Jumper Wire"
Y1: "Crystal Oscillator"

## Free pads (board coordinates)
  oval 60x70 hole 30: 0(4449.58,5549.11) 1(4549.58,4649.11) 2(3649.58,4649.11) 3(5349.58,5549.11) 4(6249.58,5549.11) 5(7549.58,5549.11) 6(8449.58,5549.11) 7(9349.58,5549.11) 8(8549.58,4649.11) 9(7649.58,4649.11) 10(6749.58,4649.11) 11(7549.58,4029.11) 12(8449.58,4029.11) 13(9349.58,4029.11) 14(8549.58,3129.11) 15(7649.58,3129.11) 16(6749.58,3129.11) 17(7549.58,2559.11) 18(8449.58,2559.11) 19(9349.58,2559.11) 20(8549.58,1659.11) 21(7649.58,1659.11) 22(6749.58,1659.11) 23(6749.58,189.11) 24(7649.58,189.11) 25(8549.58,189.11) 26(9349.58,1089.11) 27(8449.58,1089.11) 28(7549.58,1089.11) 29(2229.58,239.11) 30(1329.58,239.11) 31(429.58,239.11) 32(1229.58,1139.11) 33(2129.58,1139.11) 34(3029.58,1139.11) 35(2229.58,1709.11) 36(1329.58,1709.11) 37(429.58,1709.11) 38(1229.58,2609.11) 39(2129.58,2609.11) 40(3029.58,2609.11) 41(1329.58,3179.11) 42(429.58,3179.11) 43(2229.58,3179.11) 44(2129.58,4079.11) 45(3029.58,4079.11) 46(1229.58,4079.11) 47(429.58,4649.11) 48(1329.58,4649.11) 49(2229.58,4649.11) 50(3029.58,5549.11) 51(2129.58,5549.11) 52(1229.58,5549.11)
  round 60 hole 30: 1(9.58,6639.11) 2(5599.58,289.11) 2(5806.67,3424.31) 2(9842.1,-0.89) 3(9839.58,6639.11) 9(1109.58,6299.74) 10(1119.58,6299.74) 11(1129.58,6299.74) 12(1139.58,6299.74) 13(1149.58,6299.74) 14(1149.58,6299.74) 15(1159.58,6299.11) 16(1169.58,6299.74) 17(942.73,6399.11) 18(942.73,6409.11) 19(942.73,6419.11) 20(942.73,6425.72) 21(942.73,6429.11) 22(942.73,6439.11) 23(942.73,6449.11) 24(1119.58,6543.83) 25(1129.58,6543.83) 26(1139.58,6543.83) 27(1149.58,6543.83) 28(1159.58,6543.83)
  rect 60x60 smd far side: 2(3029.58,609.11) 2(3029.58,809.11) 2(3129.58,609.11) 2(3129.58,809.11)

## Via types
v1: diameter 70, hole 28, Top Layer to Bottom Layer, 157 vias
v2: diameter 60, hole 28, Top Layer to Bottom Layer, 46 vias
v3: diameter 65, hole 28, Top Layer to Bottom Layer, 2 vias
v4: diameter 50, hole 28, Top Layer to Bottom Layer, 1 vias

## Nets (pads, with @x,y where several pads share a name; then routed paths per layer and width w, separated by ;. In a path a pad name is that pad's centre, name@x,y a point inside that pad or via, vN(x,y) a via of type N, cw(c..) or ccw(c..) an arc to the next point about the centre after c; other vN are vias at no path point)
2_UC: P1_UC.2
2_UI_A: P1_UI_A.2
2_UI_B: P1_UI_B.2
2_UI_C: P1_UI_C.2
2_UI_D: P1_UI_D.2
2_UI_E: P1_UI_E.2
2_UI_F: P1_UI_F.2
2_UI_G: P1_UI_G.2
2_UI_H: P1_UI_H.2
3_UC: P1_UC.3
3_UI_A: P1_UI_A.3
3_UI_B: P1_UI_B.3
3_UI_C: P1_UI_C.3
3_UI_D: P1_UI_D.3
3_UI_E: P1_UI_E.3
3_UI_F: P1_UI_F.3
3_UI_G: P1_UI_G.3
3_UI_H: P1_UI_H.3
4_UC: P1_UC.4
4_UI_A: P1_UI_A.4
4_UI_B: P1_UI_B.4
4_UI_C: P1_UI_C.4
4_UI_D: P1_UI_D.4
4_UI_E: P1_UI_E.4
4_UI_F: P1_UI_F.4
4_UI_G: P1_UI_G.4
4_UI_H: P1_UI_H.4
5_UC: P1_UC.5
5_UI_A: P1_UI_A.5
5_UI_B: P1_UI_B.5
5_UI_C: P1_UI_C.5
5_UI_D: P1_UI_D.5
5_UI_E: P1_UI_E.5
5_UI_F: P1_UI_F.5
5_UI_G: P1_UI_G.5
5_UI_H: P1_UI_H.5
6_UC: P1_UC.6
6_UI_A: P1_UI_A.6
6_UI_B: P1_UI_B.6
6_UI_C: P1_UI_C.6
6_UI_D: P1_UI_D.6
6_UI_E: P1_UI_E.6
6_UI_F: P1_UI_F.6
6_UI_G: P1_UI_G.6
6_UI_H: P1_UI_H.6
7_UC: P1_UC.7
7_UI_A: P1_UI_A.7
7_UI_B: P1_UI_B.7
7_UI_C: P1_UI_C.7
7_UI_D: P1_UI_D.7
7_UI_E: P1_UI_E.7
7_UI_F: P1_UI_F.7
7_UI_G: P1_UI_G.7
7_UI_H: P1_UI_H.7
8_UC: P1_UC.8
8_UI_A: P1_UI_A.8
8_UI_B: P1_UI_B.8
8_UI_C: P1_UI_C.8
8_UI_D: P1_UI_D.8
8_UI_E: P1_UI_E.8
8_UI_F: P1_UI_F.8
8_UI_G: P1_UI_G.8
8_UI_H: P1_UI_H.8
9_UC: P1_UC.9 P2_UI_A.1 P2_UI_B.1 P2_UI_C.1 P2_UI_D.1 P2_UI_E.1 P2_UI_F.1 P2_UI_G.1 P2_UI_H.1 pad.6 pad.12@8449.58,4029.11 pad.18@8449.58,2559.11 pad.27@8449.58,1089.11 pad.30 pad.36 pad.41 pad.48 | length 16688.9
  Top Layer w15: v1(2239.58,4799.11) v1(3279.58,4799.11) ; P1_UC.9@4449.58,4649.11 4449.58,4549.11 4519.58,4479.11 6189.58,4479.11 v1(6379.58,4289.11) ; v1(7419.58,4179.11) 8159.58,4179.11 v1(8229.58,4249.11)
  Bottom Layer w15: pad.30@1329.58,239.11 1329.58,909.11 1379.58,959.11 1379.58,1479.11 1329.58,1529.11 pad.36@1329.58,1709.11 1329.58,2339.11 1379.58,2389.11 1379.58,2859.11 1329.58,2909.11 pad.41@1329.58,3179.11 1329.58,3749.11 1379.58,3799.11 1379.58,4319.11 1329.58,4369.11 pad.48@1329.58,4649.11 1329.58,4769.11 1359.58,4799.11 v1(2239.58,4799.11) ; v1(3279.58,4799.11) 4389.58,4799.11 4449.58,4739.11 P1_UC.9@4449.58,4649.11 ; v1(6379.58,4289.11) 6489.58,4179.11 v1(7419.58,4179.11) ; pad.27@8449.58,1089.11 8449.58,1349.11 8399.58,1399.11 8399.58,1929.11 8449.58,1979.11 pad.18@8449.58,2559.11 8449.58,2769.11 8399.58,2819.11 8399.58,3279.11 8449.58,3329.11 pad.12@8449.58,4029.11 v1(8229.58,4249.11) 8399.58,4419.11 8399.58,4929.11 8449.58,4979.11 pad.6@8449.58,5549.11
9_UI_A: P1_UI_A.9 P1_UI_B.9 P1_UI_C.9 P1_UI_D.9 P1_UI_E.9 P1_UI_F.9 P1_UI_G.9 P1_UI_H.9 P2_UC.1 pad.1@4549.58,4649.11 | length 19034.4
  Top Layer w15: v1(2489.58,4869.11) 3259.58,4869.11 3299.58,4909.11 v1(3299.58,4939.11) ; pad.1@4549.58,4649.11 4549.58,4569.11 4599.58,4519.11 6299.58,4519.11 6569.58,4249.11 6569.58,4129.11 6469.58,4029.11 v1(6469.58,3729.11) ; v1(7389.58,3859.11) 7589.58,3659.11 v1(8079.58,3659.11) ; v1(8259.58,4509.11) 8549.58,4219.11 P1_UI_B.9@8549.58,4029.11
  Bottom Layer w15: P1_UI_H.9@1229.58,239.11 1229.58,989.11 1179.58,1039.11 1179.58,1399.11 1229.58,1449.11 P1_UI_G.9@1229.58,1709.11 1229.58,2489.11 1179.58,2539.11 1179.58,2959.11 1229.58,3009.11 P1_UI_F.9@1229.58,3179.11 1229.58,3939.11 1179.58,3989.11 1179.58,4449.11 1229.58,4499.11 P1_UI_E.9@1229.58,4649.11 1229.58,4819.11 1309.58,4899.11 2299.58,4899.11 2329.58,4869.11 v1(2489.58,4869.11) ; v1(3299.58,4939.11) 4349.58,4939.11 4549.58,4739.11 pad.1@4549.58,4649.11 ; v1(6469.58,3729.11) 6789.58,3729.11 6919.58,3859.11 v1(7389.58,3859.11) ; v1(8079.58,3659.11) 8129.58,3659.11 8199.58,3729.11 8199.58,4129.11 8119.58,4209.11 8119.58,4299.11 8229.58,4409.11 8229.58,4479.11 v1(8259.58,4509.11) ; P1_UI_D.9@8549.58,1089.11 8549.58,1499.11 8599.58,1549.11 8599.58,1749.11 8549.58,1799.11 P1_UI_C.9@8549.58,2559.11 8549.58,3009.11 8599.58,3059.11 8599.58,3189.11 8549.58,3239.11 P1_UI_B.9@8549.58,4029.11 8549.58,4549.11 8599.58,4599.11 8599.58,4709.11 8549.58,4759.11 P1_UI_A.9@8549.58,5549.11
10KHZ: "TRIGGER C1.1" P2_UI_A.4 P2_UI_B.4 P2_UI_C.4 P2_UI_D.4 P2_UI_E.4 P2_UI_F.4 P2_UI_G.4 P2_UI_H.4 R2_UI_A.1 R2_UI_B.1 R2_UI_C.1 R2_UI_D.1 R2_UI_E.1 R2_UI_F.1 R2_UI_G.1 R2_UI_H.1 U1.11 U6.11 | length 30471.4
  Top Layer w15: R2_UI_H.1@593.87,939.58 R2_UI_H.1@593.87,931.71 593.87,844.82 889.58,549.11 1539.58,549.11 1629.58,459.11 P2_UI_H.4@1629.58,239.11 1629.58,174.11 1663.58,140.11 3069.58,140.11 3139.58,210.11 3139.58,459.11 3079.58,519.11 3079.58,1069.11 3239.58,1229.11 v1(3249.58,1229.11) ; R2_UI_G.1@593.87,2401.71 593.87,2178.46 763.22,2009.11 1439.58,2009.11 1629.58,1819.11 P2_UI_G.4@1629.58,1709.11 ; R2_UI_F.1@593.87,3871.71 593.87,3648.46 763.22,3479.11 1379.58,3479.11 1629.58,3229.11 P2_UI_F.4@1629.58,3179.11 ; R2_UI_E.1@593.87,5341.71 593.87,5118.46 763.22,4949.11 1439.58,4949.11 1629.58,4759.11 P2_UI_E.4@1629.58,4649.11 ; v1(3399.58,1139.11) 3399.58,929.11 3469.58,859.11 U1.11@3529.58,859.11 ; v2(6589.58,1189.11) 6609.58,1169.11 6609.58,829.11 6629.58,809.11 U6.11@6694.07,809.11 ; v1(7799.58,1249.11) 7959.58,1249.11 8099.58,1389.11 v1(8109.58,1389.11) ; P2_UI_D.4@8149.58,1089.11 8149.58,969.11 8329.58,789.11 9015.94,789.11 9185.3,619.76 R2_UI_D.1@9185.3,396.51 ; P2_UI_C.4@8149.58,2559.11 8149.58,2439.11 8329.58,2259.11 9015.94,2259.11 9185.3,2089.76 R2_UI_C.1@9185.3,1866.51 ; P2_UI_B.4@8149.58,4029.11 8149.58,3959.11 8379.58,3729.11 9015.94,3729.11 9185.3,3559.76 R2_UI_B.1@9185.3,3336.51 ; P2_UI_A.4@8149.58,5549.11 8149.58,5459.11 8309.58,5299.11 8965.94,5299.11 9015.94,5249.11 9185.3,5079.76 R2_UI_A.1@9185.3,4848.64
  Bottom Layer w15: P2_UI_H.4@1629.58,239.11 1629.58,379.11 1579.58,429.11 1579.58,1269.11 1489.58,1359.11 1489.58,1499.11 1629.58,1639.11 P2_UI_G.4@1629.58,1709.11 1629.58,2489.11 ; 1629.58,2494.11 1629.58,2489.11 ; P2_UI_E.4@1629.58,4649.11 1629.58,4399.11 1579.58,4349.11 1579.58,3969.11 1629.58,3919.11 P2_UI_F.4@1629.58,3179.11 1629.58,3029.11 1579.58,2979.11 1579.58,2539.11 1629.58,2489.11 ; v1(3249.58,1229.11) 3339.58,1139.11 v1(3399.58,1139.11) 3589.58,1139.11 3699.58,1249.11 3799.58,1249.11 4109.58,1559.11 5889.58,1559.11 5989.58,1659.11 6179.58,1659.11 6179.58,1449.11 6239.58,1389.11 6389.58,1389.11 v2(6589.58,1189.11) 6649.58,1249.11 v1(7799.58,1249.11) ; P2_UI_D.4@8149.58,1089.11 8149.58,1349.11 v1(8109.58,1389.11) 8109.58,1509.11 8099.58,1519.11 8099.58,2379.11 8149.58,2429.11 P2_UI_C.4@8149.58,2559.11 8149.58,2899.11 8099.58,2949.11 8099.58,3469.11 8009.58,3559.11 8009.58,3779.11 8149.58,3919.11 P2_UI_B.4@8149.58,4029.11 8059.58,4119.11 8059.58,4519.11 8099.58,4559.11 8099.58,5259.11 8149.58,5309.11 P2_UI_A.4@8149.58,5549.11
11_UC: P2_UC.2
11_UI_A: P2_UI_A.2
11_UI_B: P2_UI_B.2
11_UI_C: P2_UI_C.2
11_UI_D: P2_UI_D.2
11_UI_E: P2_UI_E.2
11_UI_F: P2_UI_F.2